# Altium PCB EST_MainV20.PcbDoc (part 5 of 8)
Units mm, origin at the board's own origin, x right, y up, seen from the top; angles counter-clockwise.
Board outline 69.72 x 115.32 mm, 2 copper layers (Top Layer, Bottom Layer); 330 components, 239 nets, 1066 pads, 416 vias.
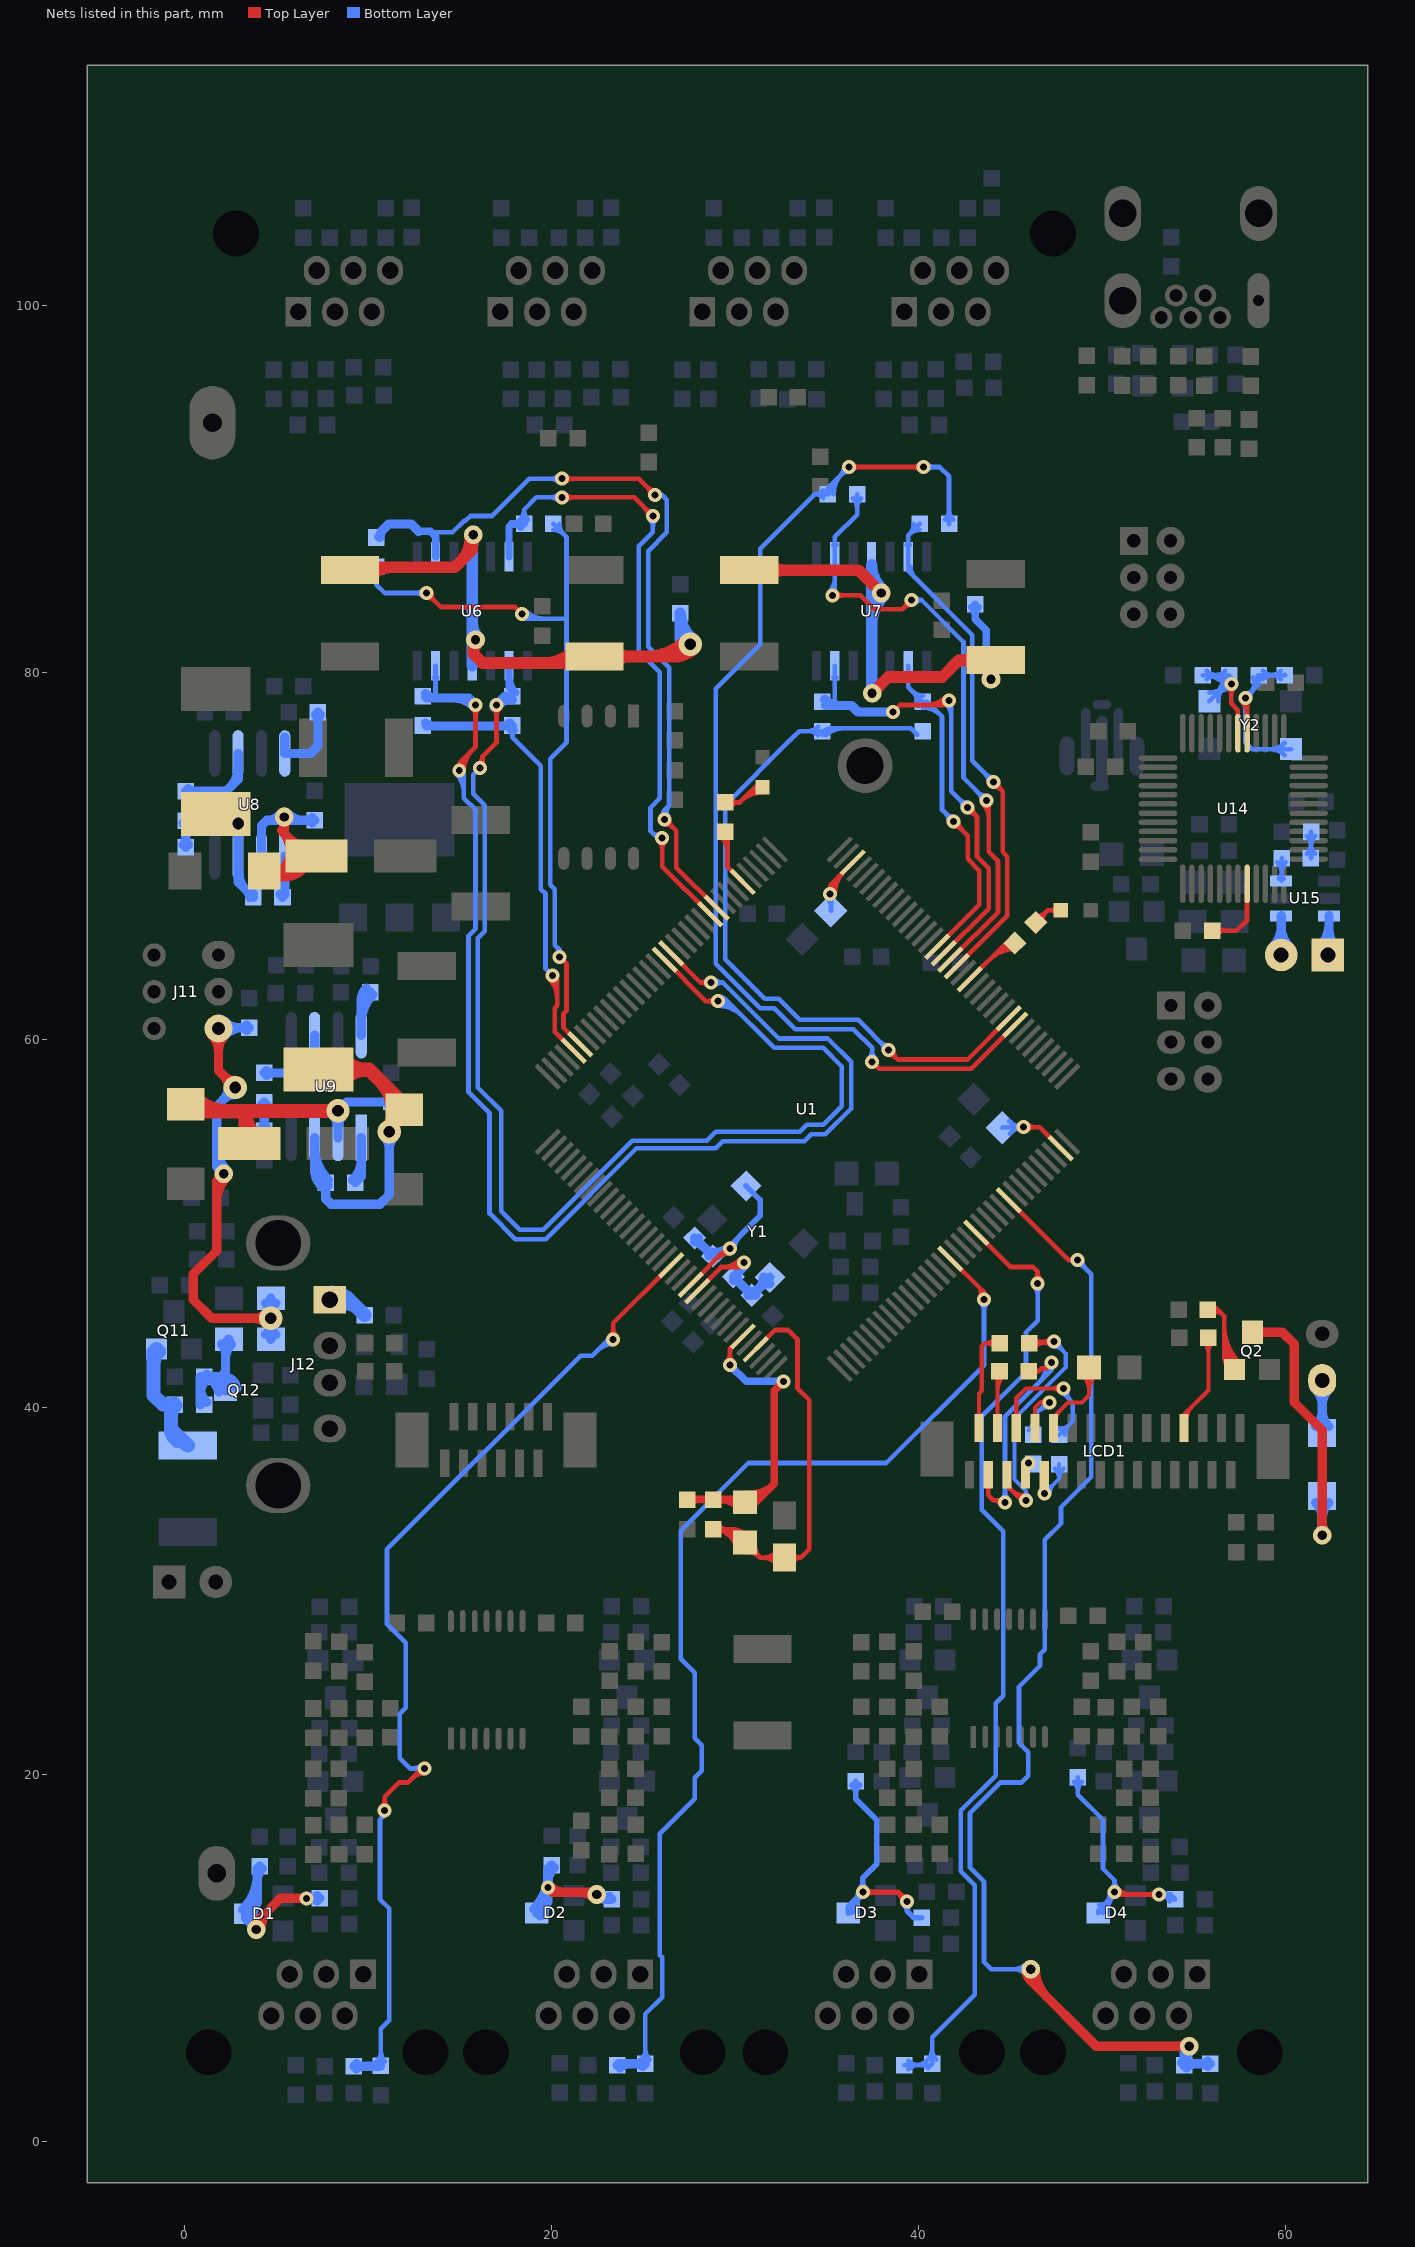
[diagram p5: the nets of this part, all layers, seen from the top]

## Via types
v1: diameter 0.762, hole 0.381, Top Layer to Bottom Layer, 258 vias
v2: diameter 1.27, hole 0.635, Top Layer to Bottom Layer, 91 vias
v3: diameter 1.016, hole 0.508, Top Layer to Bottom Layer, 66 vias
v4: diameter 1.524, hole 0.635, Top Layer to Bottom Layer, 1 vias

## Nets (pads, with @x,y where several pads share a name; then routed paths per layer and width w, separated by ;. In a path a pad name is that pad's centre, name@x,y a point inside that pad or via, vN(x,y) a via of type N, cw(c..) or ccw(c..) an arc to the next point about the centre after c; other vN are vias at no path point) (continued)
LED1: R169.2 U1.88 | length 6.4
  Top Layer w0.254: U1.88@42.786,63.29 44.758,65.262 R169.2@45.247,65.262 ; 43.861,64.366 cw(c45.247,62.98) R169.2@45.247,64.939 ; 44.295,64.799 cw(c45.247,63.847) R169.2@45.247,65.193 ; R169.2@44.729,65.233 cw(c45.247,64.715) R169.2@45.247,65.447
LED2: R170.2 U1.114 | length 4.8
  Top Layer w0.254: R170.2@29.235,71.095 cw(c28.376,70.236) 29.591,70.236 ; R170.2@29.415,71.275 cw(c28.989,70.849) 29.591,70.849 ; R170.2@29.464,71.323 29.591,71.196 29.591,69.415 U1.114@30.412,68.594 ; 29.591,70.851 cw(c29.936,70.851) R170.2@29.692,71.095
LEGDETA: C19.1 R50.2 U1.20 | length 63.2
  Top Layer w0.254: v1@10.742,18.214 ccw(c10.309,18.647) 10.922,18.647 ccw(c11.535,18.647) v1@11.102,18.214 ; v1(10.922,18.034) 10.922,18.796 11.684,19.558 12.192,19.558 v1@13.208,20.574 ; 12.431,19.797 cw(c13.081,19.146) v1@13.081,20.066 ; 12.737,20.103 ccw(c12.52,20.32) v1@12.827,20.32 ; v1@23.188,43.868 ccw(c22.755,44.301) 23.368,44.301 ccw(c23.981,44.301) v1@23.548,43.868 ; v1(23.368,43.688) 23.368,44.579 U1.20@26.523,47.734
  Bottom Layer w0.254: C19.1@10.492,4.364 ccw(c9.94,4.916) 10.72,4.916 ccw(c11.5,4.916) C19.1@10.948,4.364 ; C19.1@10.72,4.136 10.72,6.148 11.176,6.604 11.176,12.7 10.668,13.208 10.668,17.526 10.922,17.78 v1(10.922,18.034) ; v1@12.901,20.14 ccw(c12.468,19.707) 12.468,20.32 ccw(c12.468,20.933) v1@12.901,20.5 ; v1(13.081,20.32) 12.319,20.32 11.747,20.892 11.747,23.304 12.065,23.622 12.065,27.178 11.049,28.194 11.049,32.258 21.59,42.799 22.225,42.799 23.114,43.688 v1(23.368,43.688) ccw(c23.368,43.075) 22.934,43.508 ; 22.501,43.075 cw(c23.368,42.208) v1@23.368,43.434
  Bottom Layer w0.508: R50.2@9.251,4.108 C19.1@10.692,4.108 ; R50.2@9.389,3.97 cw(c9.724,3.635) 9.724,4.108 cw(c9.724,4.581) R50.2@9.389,4.247 ; 10.179,4.108 ccw(c10.179,4.677) C19.1@10.581,4.275
LEGDETB: C20.1 R52.2 U1.54 | length 64.2
  Top Layer w0.254: U1.54@41.725,48.088 43.383,46.431 ; 43.454,46.359 cw(c43.117,46.021) v1(43.561,45.847) 43.383,46.025 43.383,46.431 ; 43.561,46.228 43.561,46.252 43.383,46.431 ; v1@43.635,46.09 cw(c43.739,46.431) 43.383,46.431
  Bottom Layer w0.254: C20.1@24.888,4.473 ccw(c24.337,5.025) 25.117,5.025 ccw(c25.896,5.025) C20.1@25.345,4.473 ; C20.1@25.117,4.245 25.117,6.956 26.035,7.874 26.035,10.033 25.908,10.16 25.908,16.764 27.813,18.669 27.813,19.812 28.194,20.193 28.194,21.59 27.813,21.971 27.813,25.527 27.051,26.289 27.051,33.274 30.734,36.957 38.227,36.957 43.561,42.291 v1(43.561,45.847) v1@43.561,45.974 ; v1@43.381,45.667 cw(c42.948,45.234) 43.561,45.234 cw(c44.174,45.234) v1@43.741,45.667
  Bottom Layer w0.508: R52.2@23.596,4.166 23.675,4.245 C20.1@25.117,4.245 ; R52.2@23.735,4.027 cw(c24.26,3.503) 24.26,4.245 ; C20.1@24.978,4.106 ccw(c24.643,3.772) 24.643,4.245 ccw(c24.643,4.718) C20.1@24.978,4.383
LEGDETC: C21.1 R54.2 U1.58 | length 58.6
  Top Layer w0.254: U1.58@43.14,49.502 45.017,47.625 46.228,47.625 46.482,47.371 v1(46.482,46.736) ; v1@46.302,46.916 ccw(c45.869,47.349) 46.482,47.349 ccw(c47.095,47.349) v1@46.662,46.916
  Bottom Layer w0.254: R54.2@39.217,4.166 40.659,4.166 C21.1@40.738,4.245 40.738,5.686 43.053,8.001 43.053,13.97 42.291,14.732 42.291,18.034 44.196,19.939 44.196,23.876 44.602,24.282 44.602,33.249 43.434,34.417 43.434,39.497 45.847,41.91 45.847,44.069 46.482,44.704 46.482,46.482 v1@46.228,46.736 ; R54.2@39.446,3.938 cw(c39.997,3.386) 39.997,4.166 cw(c39.997,4.946) R54.2@39.446,4.394 ; 39.768,4.166 ccw(c39.768,5.215) 40.509,4.473 ccw(c39.958,5.025) 40.738,5.025 ccw(c41.517,5.025) C21.1@40.966,4.473 ; 40.148,4.166 cw(c40.148,3.655) C21.1@40.509,4.016 ; v1@46.302,46.556 cw(c45.869,46.123) 46.482,46.123 cw(c47.095,46.123) v1@46.662,46.556
LEGDETD: C22.1 R56.2 U1.63 | length 74.6
  Top Layer w0.254: U1.63@44.907,51.27 48.171,48.006 v1(48.641,48.006)
  Top Layer w0.508: v3@45.847,9.398 ccw(c46.767,9.398) 46.116,8.748 ; v3(46.101,9.398) 46.101,8.763 49.657,5.207 v3(54.737,5.207) ; v3@46.355,9.398 ccw(c48.501,9.398) 46.984,7.88 ; v3@54.557,5.027 ccw(c54.124,4.594) 54.124,5.207 ccw(c54.124,5.82) v3@54.557,5.387 ; 46.101,8.785 cw(c46.714,8.785) 46.281,9.218 ccw(c46.714,8.785) 46.101,8.785 ; 46.101,8.785 ccw(c45.488,8.785) 45.921,9.218 cw(c45.488,8.785) 46.101,8.785
  Bottom Layer w0.254: v3@45.832,9.129 ccw(c45.181,8.478) 45.181,9.398 ccw(c45.181,10.318) v3@45.832,9.667 ; v3(46.101,9.398) 43.942,9.398 43.561,9.779 43.561,14.15 42.799,14.912 42.799,17.907 44.45,19.558 45.593,19.558 45.974,19.939 45.974,21.209 45.466,21.717 45.466,24.765 46.609,25.908 46.609,26.543 46.863,26.797 46.863,32.766 47.752,33.655 47.752,34.544 49.403,36.195 49.403,47.244 v1(48.641,48.006) ; v1@48.641,47.752 cw(c48.641,47.139) 49.075,47.572 cw(c49.508,48.006) v1@48.895,48.006
  Bottom Layer w0.508: R56.2@54.319,4.305 ccw(c53.984,4.639) 54.457,4.639 ccw(c54.931,4.639) R56.2@54.596,4.305 ; R56.2@54.457,4.129 cw(c55.559,4.129) v3@54.891,5.005 ; R56.2@54.596,4.027 cw(c55.121,3.503) 55.121,4.245 ; v3(54.737,5.207) 54.457,4.927 R56.2@54.457,4.166 54.536,4.245 C22.1@55.876,4.245 ; C22.1@55.737,4.106 ccw(c55.403,3.772) 55.403,4.245 ccw(c55.403,4.718) C22.1@55.737,4.383
MAIN0: R106.1 U1.125 U6.6 | length 80.8
  Top Layer w0.254: v1@15.24,74.676 cw(c16.773,74.676) 15.689,75.76 ; 15.255,75.326 ccw(c15.906,74.676) v1(14.986,74.676) 14.986,75.057 15.875,75.946 v1(15.875,78.232) ; v1@15.695,78.052 cw(c15.262,77.619) 15.875,77.619 cw(c16.488,77.619) v1@16.055,78.052 ; U1.125@26.523,64.705 28.108,63.119 ; v1@28.518,62.944 ccw(c28.108,62.552) 28.108,63.119 ; v1@28.518,63.294 cw(c28.108,63.686) 28.108,63.119 ; v1(28.702,63.119) 28.108,63.119
  Bottom Layer w0.254: U6.6@13.607,79.729 cw(c13.397,79.519) 13.694,79.519 cw(c13.991,79.519) U6.6@13.781,79.729 ; U6.6@13.694,80.366 13.694,78.635 13.716,78.613 ; v1@14.806,74.496 cw(c13.76,73.45) 15.24,73.45 ; v1@14.986,74.803 v1(14.986,74.676) ; 15.24,74.063 ccw(c14.373,74.063) v1(14.986,74.676) ; v1(28.702,63.119) 29.337,63.119 32.385,60.071 35.052,60.071 36.322,58.801 36.322,56.261 34.925,54.864 34.163,54.864 33.782,54.483 29.337,54.483 28.956,54.102 24.638,54.102 19.685,49.149 18.034,49.149 16.637,50.546 16.637,56.007 15.494,57.15 15.494,65.659 15.875,66.04 15.875,72.517 15.24,73.152 15.24,74.422 v1(14.986,74.676) ; v1@28.882,62.939 cw(c29.315,62.506) 29.315,63.119 cw(c29.315,63.732) v1@28.882,63.299
  Bottom Layer w0.508: R106.1@13.145,78.852 ccw(c13.716,79.415) 13.716,78.613 ; R106.1@13.157,78.664 13.208,78.613 13.716,78.613 ; 14.649,78.613 cw(c14.649,77.006) v1@15.785,78.142 ; v1@15.85,78.207 v1(15.875,78.232) 15.494,78.613 13.716,78.613
MAIN1: R105.1 U1.126 U6.2 | length 76.7
  Top Layer w0.254: v1@16.009,75.027 ccw(c15.79,75.438) 16.256,75.438 ; v1@16.256,74.803 16.256,75.438 ; v1@16.838,78.052 cw(c16.405,77.619) 17.018,77.619 cw(c17.631,77.619) v1@17.198,78.052 ; v1(17.018,78.232) 17.018,76.2 16.256,75.438 ; U1.126@26.169,64.351 28.417,62.103 v1(29.083,62.103) ; v1@28.903,61.923 ccw(c28.47,61.49) 28.47,62.103 ccw(c28.47,62.716) v1@28.903,62.283
  Bottom Layer w0.254: v1(16.129,74.803) 15.748,74.422 15.748,73.406 16.383,72.771 16.383,65.913 16.002,65.532 16.002,57.404 17.272,56.134 17.272,50.673 18.288,49.657 19.558,49.657 24.409,54.508 28.473,54.508 28.956,54.991 33.528,54.991 33.909,55.372 34.798,55.372 35.814,56.388 35.814,58.547 34.798,59.563 32.131,59.563 29.591,62.103 ; v1@29.083,61.849 cw(c29.083,60.009) 30.384,61.31 ; v1@29.083,62.357 cw(c29.083,61.744) 29.517,62.177 ; v1@29.232,61.897 cw(c29.51,61.514) 29.845,61.849 ; v1@29.286,61.951 cw(c29.591,61.722) 29.591,62.103 ; v1@29.286,62.255 ccw(c29.591,62.484) 29.591,62.103 ; 29.635,62.059 ccw(c29.333,61.758) v1(29.083,62.103) ; 29.95,61.744 ccw(c29.083,60.877) v1(29.083,62.103) ; v1(29.083,62.103) 29.591,62.103
  Bottom Layer w0.406: U6.2@17.694,79.763 ccw(c18.931,79.763) R105.1@18.057,78.889 ; U6.2@17.694,80.366 17.694,79.207 17.882,79.019 R105.1@17.882,78.715
  Bottom Layer w0.508: v1@16.896,78.11 cw(c17.882,77.125) R105.1@17.882,78.519 ; v1(17.018,78.232) R105.1@17.501,78.715
MAPWM: R105.2 R106.2 U1.140 | length 27.5
  Top Layer w0.254: v1@19.886,63.32 cw(c18.84,62.274) 20.32,62.274 ; 20.32,62.887 ccw(c19.453,62.887) v1(20.066,63.5) 20.32,63.246 20.32,61.849 20.193,61.722 20.193,60.428 U1.140@21.219,59.401
  Bottom Layer w0.254: R105.2@17.692,76.854 cw(c17.418,76.479) 17.882,76.479 ; R105.2@17.882,77.115 17.882,77.089 17.882,76.479 ; R105.2@18.072,76.854 ccw(c18.346,76.479) 17.882,76.479 ; v1(20.066,63.5) 19.685,63.881 19.685,67.945 19.431,68.199 19.431,74.93 18.288,76.073 17.882,76.479
  Bottom Layer w0.508: R106.2@13.144,77.253 ccw(c13.54,77.65) 13.54,77.089 ; R106.2@13.208,77.089 R105.2@17.882,77.089 ; 17.347,77.089 ccw(c17.347,77.65) R105.2@17.743,77.253
MBIN0: R108.1 U1.118 U6.9 | length 50.7
  Top Layer w0.254: v1(20.574,90.551) 24.765,90.551 v1(25.654,89.662) ; v1@20.754,90.371 cw(c21.187,89.938) 21.187,90.551 cw(c21.187,91.164) v1@20.754,90.731 ; v1@25.4,89.662 ccw(c24.787,89.662) 25.22,90.096 ccw(c25.654,90.529) v1@25.654,89.916 ; v1@26.162,71.755 cw(c26.162,71.142) 26.596,71.575 cw(c27.029,72.009) v1@26.416,72.009 ; v1(26.162,72.009) 26.797,71.374 26.797,69.38 U1.118@28.998,67.18
  Bottom Layer w0.254: R108.1@10.465,87.351 10.465,87.401 R108.1@10.744,87.68 ; 13.487,87.63 14.618,87.63 15.253,88.265 ; 15.289,88.228 15.58,88.519 16.764,88.519 18.796,90.551 v1(20.574,90.551) ; v1@20.394,90.371 ccw(c19.961,89.938) 19.961,90.551 ccw(c19.961,91.164) v1@20.394,90.731 ; v1@26.01,72.212 ccw(c25.781,72.517) 26.162,72.517 ; 26.171,89.526 ccw(c25.796,89.15) v1(25.654,89.662) 26.035,89.662 26.289,89.408 26.289,87.63 25.273,86.614 25.273,81.407 26.416,80.264 26.416,72.771 ; 26.206,72.561 ccw(c26.507,72.259) v1(26.162,72.009) 26.162,72.517 ; v1@26.314,72.212 cw(c26.543,72.517) 26.162,72.517 ; v1@26.368,72.158 cw(c26.751,72.436) 26.416,72.771 ; 26.162,72.517 26.416,72.771
  Bottom Layer w0.406: 12.763,87.694 13.399,87.694 13.694,87.398 U6.9@13.694,86.306
  Bottom Layer w0.508: R108.1@10.661,87.351 cw(c11.257,87.351) R108.1@10.836,87.772 ; R108.1@10.744,87.68 11.151,88.087 12.37,88.087 12.763,87.694
MBIN1: R107.1 U1.119 U6.13 | length 42.8
  Top Layer w0.254: v1(20.574,89.535) 24.511,89.535 v1(25.527,88.519) ; v1@20.754,89.355 cw(c21.187,88.922) 21.187,89.535 cw(c21.187,90.148) v1@20.754,89.715 ; v1@25.273,88.519 ccw(c24.66,88.519) 25.093,88.953 ccw(c25.527,89.386) v1@25.527,88.773 ; v1@25.855,70.813 cw(c25.422,70.38) 26.035,70.38 cw(c26.648,70.38) v1@26.215,70.813 ; v1(26.035,70.993) 26.035,69.435 U1.119@28.644,66.826
  Bottom Layer w0.254: R107.1@18.288,88.316 ccw(c17.737,88.867) 18.517,88.867 ccw(c19.296,88.867) R107.1@18.745,88.316 ; R107.1@18.517,88.367 R107.1@18.517,88.088 18.517,88.875 19.177,89.535 v1(20.574,89.535) ; v1@20.394,89.355 ccw(c19.961,88.922) 19.961,89.535 ccw(c19.961,90.148) v1@20.394,89.715 ; v1@25.347,88.339 cw(c24.914,87.906) 25.527,87.906 cw(c26.14,87.906) v1@25.707,88.339 ; 25.527,71.247 ccw(c25.737,71.457) v1@25.898,71.207 ; v1(25.527,88.519) 25.527,87.63 24.765,86.868 24.765,81.153 25.908,80.01 25.908,73.152 25.4,72.644 25.4,71.374 25.781,70.993 v1(26.035,70.993)
  Bottom Layer w0.406: U6.13@17.694,86.306 17.694,87.925 17.857,88.088 R107.1@18.517,88.088 ; R107.1@18.342,87.913 ccw(c17.921,87.492) 17.921,88.088 ccw(c17.921,88.683) R107.1@18.342,88.262
MBPWM: R107.2 R108.2 U1.139 | length 48.2
  Top Layer w0.254: v1@13.208,84.074 cw(c13.208,83.461) 13.642,83.894 cw(c14.075,84.328) v1@13.462,84.328 ; v1(13.208,84.328) 13.97,83.566 18.034,83.566 v1(18.415,83.185) ; v1(20.447,64.516) 20.828,64.135 20.828,61.595 20.661,61.428 20.661,60.666 U1.139@21.573,59.755
  Bottom Layer w0.254: R108.2@10.237,85.522 cw(c9.685,84.971) 10.465,84.971 cw(c11.245,84.971) R108.2@10.694,85.522 ; R108.2@10.465,85.751 10.465,84.785 10.922,84.328 v1(13.208,84.328) ; v1@13.028,84.148 ccw(c12.595,83.715) 12.595,84.328 ccw(c12.595,84.941) v1@13.028,84.508 ; v1@18.415,82.931 20.828,82.931 ; v1(18.415,83.185) ccw(c19.028,83.798) 19.028,82.931 ; v1@18.595,83.365 ccw(c19.641,84.411) 19.641,82.931 ; R107.2@20.117,87.765 cw(c20.117,86.985) 20.668,87.536 cw(c21.219,88.088) R107.2@20.44,88.088 ; R107.2@20.117,88.088 20.828,87.376 20.828,82.931 ; 20.311,65.033 cw(c19.935,64.658) v1(20.447,64.516) ; 20.447,64.897 20.193,65.151 20.193,68.199 19.939,68.453 19.939,75.311 20.828,76.2 20.828,82.931
MCIN0: R124.1 U1.92 U7.6 | length 32.2
  Top Layer w0.254: v1(38.608,77.851) 38.989,78.232 41.402,78.232 v1(41.656,78.486) cw(c41.043,79.099) 41.043,78.232 ; 40.43,78.232 ccw(c40.43,79.712) v1@41.476,78.666 ; U1.92@41.372,64.705 43.815,67.148 43.815,69.342 43.18,69.977 43.18,72.136 v1(42.672,72.644) ; v1@42.672,72.39 cw(c42.672,71.777) 43.106,72.21 cw(c43.539,72.644) v1@42.926,72.644
  Bottom Layer w0.254: U7.6@35.35,79.729 cw(c35.14,79.519) 35.437,79.519 cw(c35.734,79.519) U7.6@35.524,79.729 ; 35.433,78.207 35.437,78.21 U7.6@35.437,80.366 ; v1@41.476,78.306 cw(c40.736,77.566) 41.783,77.566 ; v1(41.656,78.486) 41.783,78.359 41.783,73.533 v1(42.672,72.644) ; v1@42.418,72.644 ccw(c41.805,72.644) 42.238,73.078 ccw(c42.672,73.511) v1@42.672,72.898
  Bottom Layer w0.508: R124.1@34.886,78.548 ccw(c35.711,79.374) 35.711,78.207 ; R124.1@34.951,78.207 35.433,78.207 ; v1(38.608,77.851) 36.703,77.851 36.347,78.207 35.433,78.207 ; 35.433,78.207 cw(c35.433,78.799) 34.918,78.506 ccw(c35.433,78.799) 35.433,78.207
MCIN1: R123.1 U1.93 U7.2 | length 23.3
  Top Layer w0.254: U1.93@41.018,65.058 43.307,67.347 43.307,69.215 42.672,69.85 42.672,71.12 v1(41.91,71.882) ; v1@41.91,71.628 cw(c41.91,71.015) 42.344,71.448 cw(c42.777,71.882) v1@42.164,71.882
  Bottom Layer w0.254: U7.2@39.35,79.729 cw(c39.14,79.519) 39.437,79.519 cw(c39.734,79.519) U7.2@39.524,79.729 ; U7.2@39.437,80.366 39.437,79.207 R123.1@40.234,78.41 40.462,78.41 41.275,77.597 41.275,73.406 41.275,72.517 v1(41.91,71.882) ; R123.1@39.911,78.41 ccw(c39.131,78.41) 39.683,78.961 ccw(c40.234,79.513) R123.1@40.234,78.733 ; R123.1@39.929,78.207 R123.1@40.03,78.207 ; R123.1@40.234,78.087 cw(c40.234,76.756) 41.175,77.697 ; R123.1@40.234,78.341 cw(c40.234,77.623) 40.741,78.131 ; v1@41.656,71.882 ccw(c41.043,71.882) 41.476,72.316 ccw(c41.91,72.749) v1@41.91,72.136
MCPWM: R123.2 R124.2 U1.82 | length 44.9
  Top Layer w0.254: v1@38.354,59.182 cw(c38.354,58.569) 38.788,59.002 cw(c39.221,59.436) v1@38.608,59.436 ; v1(38.354,59.436) 38.862,58.928 42.666,58.928 U1.82@44.907,61.169
  Bottom Layer w0.254: 33.3,76.607 33.02,76.327 ; R124.2@34.519,76.581 ccw(c33.968,76.03) 33.968,76.81 ccw(c33.968,77.59) R124.2@34.519,77.038 ; R124.2@34.748,76.607 34.951,76.607 35.306,76.962 ; R124.2@34.748,76.81 33.503,76.81 33.02,76.327 ; R124.2@34.796,76.761 cw(c35.282,76.276) 35.282,76.962 ; R124.2@34.976,76.581 cw(c35.895,75.663) 35.895,76.962 ; R124.2@35.066,76.758 cw(c35.306,76.719) 35.306,76.962 ; v1@38.1,59.436 ccw(c37.487,59.436) 37.92,59.87 ccw(c38.354,60.303) v1@38.354,59.69 ; v1(38.354,59.436) 36.703,61.087 33.528,61.087 32.385,62.23 31.623,62.23 29.464,64.389 29.464,72.771 33.02,76.327 ; R123.2@39.929,76.607 39.574,76.962 35.306,76.962
MDIN0: R126.1 U1.91 U7.9 | length 41.1
  Top Layer w0.254: v1(35.306,84.201) 36.83,84.201 37.592,83.439 39.116,83.439 v1(39.624,83.947) ; v1@35.486,84.021 cw(c35.919,83.588) 35.919,84.201 cw(c35.919,84.814) v1@35.486,84.381 ; v1@39.37,83.947 cw(c38.757,83.947) 39.19,83.513 cw(c39.624,83.08) v1@39.624,83.693 ; U1.91@41.725,64.351 44.323,66.949 44.323,69.723 43.815,70.231 v1@43.815,72.898 ; v1@43.508,72.845 cw(c42.768,72.105) 43.815,72.105
  Bottom Layer w0.254: v1@35.126,84.381 ccw(c34.377,85.13) 35.437,85.13 ; v1(35.306,84.201) 35.437,84.332 U7.9@35.437,86.306 35.437,87.38 36.652,88.595 R126.1@36.652,89.712 ; U7.9@35.35,85.669 cw(c35.14,85.459) 35.437,85.459 cw(c35.734,85.459) U7.9@35.524,85.669 ; U7.9@35.35,86.943 ccw(c35.14,87.153) 35.437,87.153 ccw(c35.734,87.153) U7.9@35.524,86.943 ; R126.1@36.424,89.484 cw(c35.872,88.933) 36.652,88.933 cw(c37.432,88.933) R126.1@36.881,89.484 ; v1(39.624,83.947) 40.155,83.947 ; v1@39.822,83.788 cw(c40.155,83.519) 40.155,83.947 ; v1@39.822,84.106 ccw(c40.155,84.375) 40.155,83.947 ; v1@43.434,73.025 ccw(c42.821,73.025) 43.254,73.459 ccw(c43.688,73.892) v1@43.688,73.279 ; v1(43.688,73.025) 42.443,74.27 42.443,81.659 40.155,83.947
MDIN1: R125.1 U1.90 U7.13 | length 32
  Top Layer w0.254: U1.90@42.079,63.998 44.831,66.75 44.831,69.977 44.577,70.231 44.577,73.533 v1(44.069,74.041) ; v1@44.069,73.787 cw(c44.069,73.174) 44.503,73.607 cw(c44.936,74.041) v1@44.323,74.041
  Bottom Layer w0.254: U7.13@39.35,86.943 ccw(c39.14,87.153) 39.437,87.153 ccw(c39.734,87.153) U7.13@39.524,86.943 ; U7.13@39.56,85.756 ccw(c40.398,85.756) 39.805,85.163 ; R125.1@39.733,88.088 cw(c38.953,88.088) 39.504,87.536 cw(c40.056,86.985) R125.1@40.056,87.765 ; R125.1@40.056,88.088 39.437,87.469 U7.13@39.437,86.306 39.437,85.531 42.926,82.042 42.926,75.184 v1(44.069,74.041) ; v1@43.815,74.041 ccw(c43.202,74.041) 43.635,74.475 ccw(c44.069,74.908) v1@44.069,74.295
MDPWM: R125.2 R126.2 U1.81 | length 68.2
  Top Layer w0.254: v1(36.195,91.186) v1(40.259,91.186) ; v1@36.375,91.006 cw(c36.808,90.573) 36.808,91.186 cw(c36.808,91.799) v1@36.375,91.366 ; v1(37.465,58.801) 37.846,58.42 42.865,58.42 U1.81@45.261,60.816 ; v1@40.079,91.006 ccw(c39.646,90.573) 39.646,91.186 ccw(c39.646,91.799) v1@40.079,91.366
  Bottom Layer w0.254: R126.2@34.809,89.5 ccw(c34.34,89.09) 34.34,89.712 ; R126.2@34.809,89.925 cw(c34.34,90.335) 34.34,89.712 ; R126.2@35.121,89.712 cw(c36.086,89.712) 35.404,90.395 ; R126.2@35.375,89.712 cw(c36.954,89.712) 35.838,90.829 ; v1@36.195,90.932 ccw(c36.195,90.319) 35.761,90.752 ccw(c35.328,91.186) 35.941,91.186 v1(36.195,91.186) 35.052,90.043 R126.2@35.052,89.712 34.34,89.712 ; v1@37.285,58.981 ccw(c36.852,59.414) 37.465,59.414 ccw(c38.078,59.414) v1@37.645,58.981 ; v1(37.465,58.801) 37.465,59.563 36.449,60.579 33.274,60.579 32.131,61.722 31.369,61.722 28.956,64.135 28.956,79.121 31.369,81.534 31.369,86.741 34.34,89.712 ; v1(40.259,91.186) 41.148,91.186 41.656,90.678 R125.2@41.656,88.088 ; v1@40.439,91.006 cw(c40.872,90.573) 40.872,91.186 cw(c40.872,91.799) v1@40.439,91.366 ; R125.2@41.427,88.316 ccw(c40.876,88.867) 41.656,88.867 ccw(c42.436,88.867) R125.2@41.884,88.316
NetC1_1: C1.1 LCD1.29 | length 7.5
  Top Layer w0.229: LCD1.29@43.186,39.458 ccw(c42.954,39.69) 43.282,39.69 ccw(c43.609,39.69) LCD1.29@43.378,39.458 ; LCD1.29@43.282,38.862 43.282,40.742 43.434,40.894 43.434,41.275 ; 43.434,41.148 43.434,41.275 ; C1.1@44.183,43.252 ccw(c43.616,42.69) 43.616,43.489 ; C1.1@44.183,43.725 cw(c43.616,44.288) 43.616,43.489 ; C1.1@44.422,43.489 43.616,43.489 ; 43.434,41.275 43.434,43.307 43.616,43.489
NetC1_2: C1.2 LCD1.26 | length 23
  Top Layer w0.229: LCD1.26@44.806,36.322 44.806,35.712 45.593,34.925 v1(45.847,34.925) ; LCD1.26@44.941,35.822 ccw(c45.534,35.822) 45.115,35.403 ; 44.958,35.56 ccw(c45.847,36.449) v1@45.847,35.192 ; 45.348,35.17 ccw(c45.847,35.668) v1@45.847,34.963 ; 46.553,43.489 ccw(c46.553,44.379) 47.182,43.75 cw(c46.727,44.205) 46.727,43.561 cw(c46.727,42.917) 47.182,43.372 ccw(c46.901,43.091) 46.901,43.489 ; 46.658,43.561 cw(c46.658,44.125) 46.259,43.726 ccw(c46.832,44.299) 46.832,43.489 ccw(c46.832,42.678) 46.259,43.251 cw(c47.006,42.504) v1@47.006,43.561 ; v1@47.045,43.489 C1.2@46.022,43.489 46.094,43.561 v1(47.371,43.561)
  Bottom Layer w0.229: v1@45.696,35.145 ccw(c45.497,35.433) 45.847,35.433 ; v1(45.847,34.925) 45.847,35.433 ; v1@45.998,35.145 cw(c46.197,35.433) 45.847,35.433 ; v1@47.371,43.294 cw(c47.371,42.65) 47.826,43.106 cw(c48.282,43.561) v1@47.638,43.561 ; v1(47.371,43.561) 48.006,42.926 48.006,42.164 45.212,39.37 45.212,36.068 45.847,35.433
NetC2_1: C2.1 LCD1.28 | length 16.6
  Top Layer w0.254: LCD1.28@43.703,35.735 cw(c43.493,35.525) 43.79,35.525 cw(c44.087,35.525) LCD1.28@43.877,35.735 ; LCD1.28@43.79,36.322 43.79,35.204 44.069,34.925 ; v1@44.48,34.678 ccw(c44.069,34.459) 44.069,34.925 ; v1@44.704,34.925 44.069,34.925 ; C2.1@46.002,41.957 46.529,41.957 ; C2.1@46.29,41.811 cw(c46.529,41.689) 46.529,41.957 ; C2.1@46.29,42.103 ccw(c46.529,42.224) 46.529,41.957 ; v1(47.244,42.418) 46.927,42.101 46.673,42.101 46.529,41.957
  Bottom Layer w0.254: v1@44.524,34.978 ccw(c44.091,35.411) 44.704,35.411 ccw(c45.317,35.411) v1@44.884,34.978 ; v1@44.704,34.925 44.704,39.497 47.244,42.037 v1(47.244,42.418) cw(c46.324,42.418) 46.975,41.768 ; 46.541,41.334 ccw(c45.457,42.418) v1@46.99,42.418
  other v1: 44.704,34.798
NetC2_2: C2.2 LCD1.27 | length 5.4
  Top Layer w0.229: C2.2@44.165,41.719 cw(c43.845,41.399) 44.298,41.399 ; LCD1.27@44.202,39.458 ccw(c43.97,39.69) 44.298,39.69 ccw(c44.625,39.69) LCD1.27@44.394,39.458 ; LCD1.27@44.298,38.862 44.298,41.852 C2.2@44.402,41.957 ; 44.298,40.893 cw(c45.466,40.893) C2.2@44.64,41.719 ; 44.298,41.445 cw(c44.914,41.445) C2.2@44.478,41.881
NetC3_1: C3.1 LCD1.25 | length 11.2
  Top Layer w0.229: LCD1.25@45.218,39.458 ccw(c44.986,39.69) 45.314,39.69 ccw(c45.641,39.69) LCD1.25@45.41,39.458 ; LCD1.25@45.314,38.862 45.314,40.488 45.847,41.021 v1(47.879,41.021) ; v1@47.69,40.832 ccw(c47.235,40.377) 47.235,41.021 ccw(c47.235,41.665) v1@47.69,41.21
  Bottom Layer w0.229: C3.1@47.646,38.484 48.387,39.225 48.387,40.259 v1@47.752,40.894 ; C3.1@47.646,38.82 ccw(c47.646,39.63) 48.219,39.057 ccw(c48.793,38.484) C3.1@47.982,38.484 ; v1@47.915,41.009 ccw(c48.249,40.896) 48,40.646 ; v1@48.132,40.935 ccw(c48.638,40.764) 48.26,40.386
NetC3_2: C3.2 LCD1.22 | length 4.1
  Bottom Layer w0.229: v1(46.863,35.306) 47.646,36.089 ; v1@46.863,35.573 ccw(c46.863,36.217) 47.318,35.761 ccw(c47.774,35.306) v1@47.13,35.306 ; C3.2@47.412,36.643 cw(c46.874,36.089) 47.646,36.089 ; C3.2@47.646,36.884 47.646,36.089 ; C3.2@47.88,36.643 ccw(c48.419,36.089) 47.646,36.089
NetC4_1: C4.1 LCD1.24
  other v1: 45.974,36.957
NetC4_2: C4.2 LCD1.23 | length 7.7
  Top Layer w0.229: LCD1.23@46.234,39.458 ccw(c46.002,39.69) 46.33,39.69 ccw(c46.657,39.69) LCD1.23@46.426,39.458 ; LCD1.23@46.33,38.862 46.33,39.98 46.609,40.259 ; v1@46.897,40.108 ccw(c46.609,39.909) 46.609,40.259 ; v1@46.897,40.41 cw(c46.609,40.609) 46.609,40.259 ; v1(47.117,40.259) 46.609,40.259
  Bottom Layer w0.229: C4.2@45.995,38.741 ccw(c45.422,39.314) 46.232,39.314 ccw(c47.042,39.314) C4.2@46.469,38.741 ; C4.2@46.232,38.503 46.232,39.501 46.99,40.259 v1(47.117,40.259) ; 46.445,39.714 cw(c47.117,39.042) v1@47.117,39.992 ; 46.752,40.021 ccw(c46.513,40.259) v1@46.85,40.259
NetC5_2: C5.2 LCD1.21 | length 8.2
  Top Layer w0.229: LCD1.21@47.346,38.862 47.346,39.472 48.133,40.259 48.895,40.259 49.284,40.648 C5.2@49.284,42.166 ; LCD1.21@47.481,39.362 cw(c48.074,39.362) 47.655,39.781 ; C5.2@48.906,41.787 cw(c47.991,40.872) 49.284,40.872 cw(c50.578,40.872) C5.2@49.663,41.787 ; C5.2@49.067,41.948 cw(c48.543,41.424) 49.284,41.424 cw(c50.026,41.424) C5.2@49.502,41.948
NetC6_2: C6.2 R4.2 U1.23 Y1.1 | length 15.4
  Top Layer w0.254: U1.23@27.583,46.674 29.551,48.641 v1(29.718,48.641) ; 28.999,48.089 cw(c29.718,47.37) v1@29.718,48.387
  Bottom Layer w0.305: R4.2@28.788,48.218 ccw(c28.788,49.135) v1@29.436,48.486 ; R4.2@28.788,48.225 29.175,48.225 31.369,50.419 31.369,51.283 Y1.1@30.602,52.05 ; R4.2@28.788,48.522 ccw(c28.788,50.176) 29.957,49.007 ; R4.2@29.111,48.161 cw(c29.718,47.555) v1@29.718,48.412 ; v1@29.947,48.641 cw(c30.805,48.641) 30.198,49.248
  Bottom Layer w0.508: C6.2@27.798,49.013 cw(c27.798,48.54) 28.133,48.874 cw(c28.468,49.209) C6.2@27.994,49.209 ; C6.2@27.798,49.209 R4.2@28.782,48.225 ; 28.444,48.563 ccw(c28.788,48.906) R4.2@28.788,48.421 ; 28.457,48.551 cw(c28.131,48.225) R4.2@28.592,48.225
NetC7_2: C7.2 R4.1 U1.24 Y1.2 | length 13.1
  Top Layer w0.254: U1.24@27.937,46.32 29.242,47.625 30.226,47.625 v1(30.48,47.879) cw(c29.867,48.492) 29.867,47.625 ; 29.254,47.625 ccw(c29.254,49.105) v1@30.3,48.059
  Bottom Layer w0.508: R4.1@29.919,46.897 cw(c29.919,46.424) 30.253,46.759 cw(c30.588,47.093) R4.1@30.115,47.093 ; R4.1@30.104,47.279 ccw(c29.504,47.879) v1@30.353,47.879 ; v1(30.48,47.879) 30.48,47.654 R4.1@29.919,47.093 30.92,46.092 C7.2@30.926,46.092 Y1.2@31.9,47.068 Y1.2@31.9,47.068 ; 30.581,46.431 ccw(c30.926,46.776) 30.926,46.288 ccw(c30.926,46.761) 31.261,46.427 ccw(c31.596,46.092) C7.2@31.122,46.092 ; 30.596,46.416 cw(c30.272,46.092) C7.2@30.73,46.092 ; 31.308,46.474 ccw(c30.715,47.068) Y1.2@31.554,47.068 ; 31.312,46.478 cw(c31.9,45.891) Y1.2@31.9,46.722
NetC9_1: C9.1 U1.71 | length 7.3
  Top Layer w0.254: v1(45.72,55.245) 46.589,55.245 U1.71@47.736,54.098 ; v1@45.9,55.065 cw(c46.333,54.632) 46.333,55.245 cw(c46.333,55.858) v1@45.9,55.425
  Bottom Layer w0.254: C9.1@44.56,55.209 44.596,55.245 v1(45.72,55.245) ; C9.1@44.933,55.575 ccw(c45.72,56.347) v1(45.72,55.245) ; C9.1@44.969,54.883 cw(c45.72,54.284) v1(45.72,55.245) ; v1@45.54,55.065 ccw(c45.107,54.632) 45.107,55.245 ccw(c45.107,55.858) v1@45.54,55.425
NetC10_2: C10.2 U1.106 | length 6.4
  Top Layer w0.254: v1@35.433,67.945 cw(c37.172,67.945) U1.106@35.942,69.175 ; 35.509,68.741 ccw(c36.305,67.945) v1(35.179,67.945) 35.179,68.411 U1.106@36.422,69.654
  Bottom Layer w0.254: v1@34.999,67.765 cw(c34.453,67.219) C10.2@35.226,67.219 ; v1(35.179,67.945) 35.226,67.898 C10.2@35.226,67.029 ; C10.2@35.226,67.444 cw(c35.68,67.444) C10.2@35.359,67.765
NetC13_1: C13.1 C14.2 R10.2 U1.31 | length 27.4
  Top Layer w0.254: v1@29.538,42.471 ccw(c29.105,42.904) 29.718,42.904 ccw(c30.331,42.904) v1@29.898,42.471 ; v1(29.718,42.291) 29.718,43.151 U1.31@30.412,43.845 ; 29.718,42.943 cw(c30.221,42.943) 29.865,43.298 ccw(c29.939,43.09) 29.718,43.09
  Top Layer w0.406: R10.2@27.407,34.976 C14.2@28.822,34.976 ; R10.2@27.582,34.776 cw(c28.064,34.293) 28.064,34.976 ; R10.2@27.582,35.125 ccw(c27.942,35.485) 27.942,34.976 ; 28.161,34.976 cw(c28.161,34.283) C14.2@28.65,34.773 ; 28.298,34.976 ccw(c28.298,35.475) C14.2@28.65,35.122 ; C14.2@28.825,34.976 C13.1@30.886,34.976 ; C14.2@29,34.773 cw(c29.489,34.283) 29.489,34.976 ; C14.2@29,35.122 ccw(c29.352,35.475) 29.352,34.976 ; C14.2@29.105,34.976 cw(c29.105,33.373) C13.1@30.239,34.506 ; 29.847,34.976 ccw(c29.847,35.53) C13.1@30.239,35.138 ; C13.1@30.555,34.822 31.139,34.822 32.131,35.814 ; C13.1@30.559,34.862 ccw(c30.677,36.054) 31.524,35.207 ; C13.1@30.599,35.267 ccw(c30.787,37.158) 32.131,35.814 ; v1@32.461,41.402 cw(c32.032,41.402) 32.335,41.098 cw(c32.639,40.795) v1@32.639,41.224 ; v1(32.639,41.402) 32.131,40.894 32.131,35.814
  Bottom Layer w0.406: v1@29.718,42.113 cw(c29.718,41.684) 30.022,41.987 cw(c30.325,42.291) v1@29.896,42.291 ; v1@29.718,42.164 v1(29.718,42.291) 30.607,41.402 v1(32.639,41.402) ; v1@32.513,41.276 ccw(c32.21,40.973) 32.21,41.402 ccw(c32.21,41.831) v1@32.513,41.528
NetC13_2: C13.2 C14.1 L1.1 U1.33 | length 34.9
  Top Layer w0.254: C14.1@29.053,33.119 cw(c29.605,32.567) 29.605,33.347 cw(c29.605,34.127) C14.1@29.053,33.576 ; C14.1@29.177,33.347 cw(c29.177,32.165) C13.2@30.299,32.537 ; 29.529,33.347 cw(c29.529,32.282) C13.2@30.54,32.617 ; 29.881,33.347 cw(c29.881,32.398) C13.2@30.781,32.697 ; C13.2@30.038,32.704 ccw(c29.303,32.821) 29.829,33.347 ; C13.2@30.058,32.457 ccw(c28.825,32.048) C14.1@28.825,33.347 29.829,33.347 ; C13.2@30.472,33.139 cw(c30.356,33.873) 29.829,33.347 ; C13.2@30.586,32.1 cw(c30.649,31.074) 31.376,31.801 ; C13.2@31.077,32.59 ccw(c32.103,32.528) 31.376,31.801 ; U1.33@31.119,43.138 32.177,44.196 32.893,44.196 33.401,43.688 33.401,41.021 34.036,40.386 34.036,34.671 ; L1.1@32.332,31.442 ccw(c31.465,30.574) 31.465,31.801 ccw(c31.465,33.027) L1.1@32.332,32.16 ; L1.1@33.13,31.544 cw(c33.579,31.28) 33.579,31.801 ; L1.1@33.13,32.058 ccw(c33.579,32.322) 33.579,31.801 ; 34.036,35.56 34.036,34.671 ; 29.829,33.347 C13.2@30.555,32.622 31.376,31.801 ; 31.376,31.801 L1.1@32.691,31.801 33.579,31.801 ; 33.579,31.801 34.036,32.258 34.036,34.671
  Top Layer w0.762: L1.1@32.48,32.012 L1.1@32.691,31.801
NetC40_2: C40.2 E1.1 F2.2 U6.4 U6.11 | length 46
  Top Layer w0.635: F2.2@9.042,85.573 9.195,85.725 14.732,85.725 15.697,86.69 v3@15.697,87.198 ; F2.2@10.182,85.258 cw(c11.309,84.132) 11.309,85.725 ; 15.113,86.106 ccw(c13.989,87.23) v3@15.56,87.474 ; 15.697,86.92 cw(c16.331,86.92) v3@15.883,87.368 ; 15.748,81.021 cw(c16.642,81.021) v3@16.01,81.653 ; v3@15.748,81.356 15.748,81.026 16.256,80.518 16.891,80.518 21.082,80.518 21.438,80.874 E1.1@22.352,80.874 ; 19.595,80.518 ccw(c19.595,82.805) E1.1@21.212,81.188 ; E1.1@21.311,80.874 E1.1@22.352,80.874 ; E1.1@23.492,80.559 cw(c24.251,79.8) 24.251,80.874 cw(c24.251,81.947) E1.1@23.492,81.188 ; 25.198,80.874 ccw(c25.198,83.895) v2@27.334,81.759 ; 26.731,80.874 ccw(c26.731,82.362) v2@27.784,81.309 ; v2(27.559,81.534) 26.899,80.874 E1.1@22.352,80.874
  Bottom Layer w0.635: U6.4@15.697,80.366 15.697,85.954 v3@15.697,87.452 ; U6.4@15.697,80.899 cw(c16.764,80.899) v3@16.01,81.653 ; 15.697,82.677 ccw(c16.764,82.677) v3@16.01,81.923 ; U6.11@15.697,86.92 cw(c16.331,86.92) v3@15.883,87.368 ; 27.022,81.966 ccw(c27.873,81.966) v2@27.372,81.277 ; v2(27.559,81.534) 27.022,82.071 C40.2@27.022,83.214 ccw(c28.781,83.214) v2@27.746,81.791
  other v3: 15.875,81.788 15.748,87.503
NetC48_2: C48.2 E2.1 F3.2 U7.4 U7.11 | length 37.7
  Top Layer w0.635: F3.2@30.785,85.573 36.728,85.573 v3(37.973,84.328) ; F3.2@31.925,85.258 cw(c32.683,84.499) 32.683,85.573 cw(c32.683,86.646) F3.2@31.925,85.887 ; v3(37.465,78.867) 38.354,79.756 41.275,79.756 42.189,80.67 E2.1@44.196,80.67 ; E2.1@43.056,80.356 ccw(c42.297,79.597) 42.297,80.67 ccw(c42.297,81.744) E2.1@43.056,80.985
  Bottom Layer w0.406: C48.2@42.9,83.547 cw(c42.479,83.126) 43.074,83.126 cw(c43.67,83.126) C48.2@43.249,83.547 ; C48.2@43.074,83.722 43.074,82.91 43.688,82.296 43.688,79.883 v3(43.942,79.629) ; 43.688,80.978 ccw(c45.291,80.978) v3@44.158,79.845
  Bottom Layer w0.635: 37.44,79.388 ccw(c37.986,79.388) v3@37.6,79.002 ; 37.44,82.58 cw(c39.721,82.58) v3@38.108,84.193 ; 37.44,84.113 cw(c38.188,84.113) v3@37.659,84.642 ; 37.44,84.515 ccw(c38.126,84.515) v3@37.692,83.983 ; v3(37.465,78.867) 37.44,78.892 37.44,80.264 37.44,84.328 ; v3(37.973,84.328) 37.44,84.328 ; v3@38.093,84.476 cw(c39.215,85.852) 37.44,85.852 37.44,84.328
NetC55_1: C55.1 U8.1 | length 3
  Bottom Layer w0.508: C55.1@5.224,67.91 ccw(c4.59,68.544) 5.486,68.544 ; C55.1@5.362,67.771 5.486,67.895 U8.1@5.486,70.002
NetC55_2: C55.2 L2.1 U8.3 | length 8.2
  Top Layer w0.508: L2.1@2.435,72.292 v2(2.946,71.78)
  Bottom Layer w0.508: v2@2.677,71.511 cw(c2.027,70.861) 2.946,70.861 cw(c3.866,70.861) v2@3.216,71.511 ; v2(2.946,71.78) U8.3@2.946,70.002 2.946,68.587 C55.2@3.762,67.771 ; U8.3@2.997,69.037 ccw(c4.206,69.037) C55.2@3.351,68.182 ; C55.2@3.566,67.771 ccw(c3.093,67.771) 3.428,68.106 ccw(c3.762,68.44) C55.2@3.762,67.967
NetC56_1: C56.1 U9.1 | length 3.8
  Bottom Layer w0.508: C56.1@9.186,52.365 ccw(c8.062,53.49) U9.1@9.652,53.49 ; C56.1@9.325,52.226 9.652,52.554 U9.1@9.652,54.661
NetC56_2: C56.2 D6.2 L3.1 U9.3 | length 32.1
  Top Layer w0.508: v2@11.176,54.808 cw(c11.919,54.808) D6.2@11.888,55.55 ; v2(11.176,54.991) 11.176,55.575 11.786,56.185 ccw(c12.521,55.449) v2@11.537,55.114 ; D6.2@11.176,55.338 cw(c11.897,55.338) D6.2@11.867,56.058
  Top Layer w0.762: L3.1@7.315,58.373 10.08,58.373 11.786,56.667 D6.2@11.786,56.185 ; L3.1@8.594,57.794 cw(c9.992,56.396) 9.992,58.373 cw(c9.992,60.35) L3.1@8.594,58.952 ; 10.707,57.746 cw(c9.146,56.185) D6.2@11.354,56.185
  Bottom Layer w0.508: 7.112,52.953 ccw(c8.451,52.953) C56.2@7.504,52.006 ; U9.3@7.112,54.179 ccw(c9.677,54.179) C56.2@7.863,52.365 ; U9.3@7.112,54.661 7.112,52.839 C56.2@7.725,52.226 7.725,51.33 8.001,51.054 10.668,51.054 11.176,51.562 v2(11.176,54.991) ; C56.2@7.529,52.226 ccw(c7.056,52.226) 7.39,52.561 ccw(c7.725,52.896) C56.2@7.725,52.422 ; C56.2@7.586,52.088 cw(c7.252,51.753) 7.725,51.753 cw(c8.198,51.753) C56.2@7.863,52.088 ; v2@10.907,54.722 cw(c10.256,54.071) 11.176,54.071 cw(c12.096,54.071) v2@11.445,54.722
NetC57_1: C57.1 U8.8 | length 5.4
  Bottom Layer w0.508: U8.8@5.486,76.479 U8.8@5.486,75.59 6.883,75.59 7.293,76 C57.1@7.293,77.83 ; C57.1@7.154,77.691 cw(c6.82,77.356) 7.293,77.356 cw(c7.766,77.356) C57.1@7.431,77.691
NetC58_1: C58.1 U9.8 | length 5.4
  Bottom Layer w0.508: U9.8@9.652,60.249 9.652,62.231 ; U9.8@9.652,60.944 cw(c11.783,60.944) C58.1@10.276,62.451 ; 9.652,62.17 cw(c10.557,62.17) C58.1@9.917,62.81 ; C58.1@9.96,62.539 9.652,62.231 ; C58.1@10.138,62.59 10.011,62.59 9.652,62.231
NetC59_1: C59.1 U8.6 | length 6.2
  Bottom Layer w0.508: C59.1@0.098,73.536 2.289,73.536 2.946,74.193 U8.6@2.946,75.59 ; C59.1@0.236,73.397 cw(c0.571,73.063) 0.571,73.536 cw(c0.571,74.009) C59.1@0.236,73.675 ; 2.554,73.801 ccw(c1.73,74.625) U8.6@2.896,74.625
NetC59_2: C59.2 R141.1 | length 2.9
  Bottom Layer w0.508: C59.2@-0.041,71.797 cw(c-0.376,71.463) 0.098,71.463 cw(c0.571,71.463) C59.2@0.236,71.797 ; R141.1@-0.037,70.624 ccw(c-0.361,70.948) 0.098,70.948 ; 0.098,70.969 ccw(c0.586,70.969) R141.1@0.241,70.624 ; C59.2@0.098,71.936 0.098,70.489 R141.1@0.102,70.485
NetC60_1: C60.1 U9.6 | length 5.3
  Bottom Layer w0.508: C60.1@4.365,58.194 6.759,58.194 7.112,58.547 U9.6@7.112,60.249 ; C60.1@4.503,58.056 cw(c4.838,57.721) 4.838,58.194 cw(c4.838,58.668) C60.1@4.503,58.333
NetC60_2: C60.2 R142.1 | length 3
  Bottom Layer w0.508: C60.2@4.226,56.456 cw(c3.892,56.121) 4.365,56.121 cw(c4.838,56.121) C60.2@4.503,56.456 ; R142.1@4.231,55.18 ccw(c3.907,55.504) 4.365,55.504 ; 4.365,55.526 ccw(c4.853,55.526) R142.1@4.508,55.18 ; C60.2@4.365,56.594 4.365,55.046 R142.1@4.369,55.042
NetC69_2: C69.2 D10.2 D11.2 J11.3 | length 42.7
  Top Layer w0.508: J11.3@1.515,60.258 cw(c0.648,59.391) 1.874,59.391 cw(c3.101,59.391) J11.3@2.234,60.258 ; 1.778,51.172 cw(c3.692,51.172) v3@2.339,52.525 ; J11.3@1.874,60.618 1.874,58.324 v2(2.794,57.404) ; v3(2.159,52.705) 1.778,52.324 1.778,48.514 0.508,47.244 0.508,45.847 1.524,44.831 v2(4.724,44.831) ; v2@2.413,57.404 ccw(c1.493,57.404) 2.144,58.054 ccw(c2.794,58.705) v2@2.794,57.785 ; v2@4.455,44.562 ccw(c3.805,43.911) 3.805,44.831 ccw(c3.805,45.751) v2@4.455,45.1
  Bottom Layer w0.508: 1.778,54.238 ccw(c3.692,54.238) v3@2.339,52.885 ; J11.3@1.874,60.618 1.915,60.658 C69.2@3.552,60.658 ; v3(2.159,52.705) 1.778,53.086 1.778,56.388 v2(2.794,57.404) ; J11.3@2.234,60.258 cw(c3.199,59.293) C69.2@3.199,60.658 ; J11.3@2.234,60.977 ccw(c3.002,61.746) 3.002,60.658 ; v2@2.413,57.404 cw(c1.493,57.404) 2.144,56.754 cw(c2.794,56.103) v2@2.794,57.023 ; C69.2@3.413,60.52 ccw(c3.079,60.185) 3.079,60.658 ccw(c3.079,61.132) C69.2@3.413,60.797 ; D10.2@4.455,43.957 ccw(c3.805,44.608) 4.724,44.608 ccw(c5.644,44.608) D10.2@4.994,43.957 ; v2@4.455,44.562 cw(c3.805,43.911) 4.724,43.911 cw(c5.644,43.911) v2@4.994,44.562 ; v2@4.455,45.1 ccw(c3.805,45.751) 4.724,45.751 ccw(c5.644,45.751) v2@4.994,45.1 ; D11.2@4.455,45.654 cw(c3.805,45.003) 4.724,45.003 cw(c5.644,45.003) D11.2@4.994,45.654 ; D10.2@4.724,43.688 v2(4.724,44.831) D11.2@4.724,45.923
NetC76_2: C76.2 R166.1 U14.18 Y2.2 | length 18.4
  Top Layer w0.254: v1@56.843,79.195 cw(c56.41,78.762) 57.023,78.762 cw(c57.636,78.762) v1@57.203,79.195 ; v1(57.023,79.375) 57.023,78.314 57.383,77.954 U14.18@57.383,76.693
  Bottom Layer w0.254: C76.2@55.47,79.854 C76.2@55.475,79.858 ; C76.2@55.699,79.625 cw(c56.261,79.063) 56.261,79.858 ; C76.2@55.699,80.082 ccw(c56.24,80.623) 56.24,79.858 ; Y2.2@55.833,78.908 ccw(c55.833,80.05) 56.64,79.243 ccw(c57.448,78.435) Y2.2@56.306,78.435 ; Y2.2@55.883,78.486 Y2.2@55.833,78.435 56.769,79.372 56.769,79.706 R166.1@56.921,79.858 C76.2@55.475,79.858 ; 56.008,79.858 cw(c56.008,78.551) v1(57.023,79.375) ccw(c57.023,78.77) 56.595,79.198 ; Y2.2@56.134,78.736 ccw(c55.012,79.858) R166.1@56.598,79.858 ; Y2.2@56.162,78.764 cw(c57.023,77.903) v1@57.023,79.121 ; R166.1@56.542,79.858 cw(c56.542,78.984) R166.1@57.22,79.535 ; 56.567,79.17 ccw(c55.879,79.858) R166.1@56.852,79.858 ; R166.1@56.693,79.63 ccw(c56.142,79.078) 56.142,79.858 ccw(c56.142,80.638) R166.1@56.693,80.086 ; v1@56.826,79.215 ccw(c55.475,78.118) C76.2@55.475,79.858
NetC77_2: C77.2 R166.2 U14.17 Y2.1 | length 18.7
  Top Layer w0.254: v1@57.605,78.433 cw(c56.936,77.764) 57.883,77.764 ; U14.17@57.883,76.693 57.883,78.457 v1@57.912,78.486 ; 57.883,78.236 cw(c58.162,78.236) v1@57.965,78.433
  Bottom Layer w0.254: v1@57.605,78.433 cw(c57.172,78) 57.785,78 cw(c58.398,78) v1@57.965,78.433 ; v1@57.785,78.867 ccw(c57.785,79.48) 58.219,79.047 ccw(c58.652,78.613) v1@58.039,78.613 ; v1@58.039,78.867 ccw(c57.465,79.442) R166.2@58.221,79.74 ; 58.313,79.141 ccw(c57.858,79.597) R166.2@58.457,79.833 ; R166.2@58.75,79.63 cw(c59.301,79.078) 59.301,79.858 cw(c59.301,80.638) R166.2@58.75,80.086 ; 59.159,79.858 ccw(c59.159,80.65) C77.2@59.719,80.09 ; 59.176,79.858 cw(c59.176,79.09) C77.2@59.719,79.633 ; Y2.1@59.94,75.496 ccw(c59.132,74.688) 59.132,75.83 ccw(c59.132,76.972) Y2.1@59.94,76.165 ; C77.2@59.947,79.862 59.944,79.858 R166.2@58.521,79.858 58.521,79.349 v1(57.785,78.613) 57.785,76.2 58.155,75.83 Y2.1@60.274,75.83
NetC81_2: C81.2 U14.44 | length 5.3
  Top Layer w0.254: C81.2@55.978,65.942 57.306,65.942 57.883,66.519 U14.44@57.883,68.493 ; C81.2@56.207,65.714 cw(c56.758,65.163) 56.758,65.942 cw(c56.758,66.722) C81.2@56.207,66.171
NetC82_1: C82.1 U15.3 | length 3.1
  Bottom Layer w0.254: C82.1@59.535,69.668 cw(c58.983,69.117) 59.763,69.117 cw(c60.543,69.117) C82.1@59.992,69.668 ; U15.3@59.618,68.774 ccw(c59.269,69.123) 59.763,69.123 ; U15.3@59.763,68.674 C82.1@59.763,69.897 ; 59.763,69.015 ccw(c60.104,69.015) U15.3@59.863,68.774
NetC82_2: C82.2 R168.2 | length 3.9
  Bottom Layer w0.254: C82.2@61.135,70.125 ccw(c60.576,70.684) 61.366,70.684 ; R168.2@61.138,71.095 cw(c60.586,70.544) 61.366,70.544 cw(c62.146,70.544) R168.2@61.595,71.095 ; C82.2@61.366,69.9 R168.2@61.366,71.324 ; 61.366,70.669 ccw(c62.136,70.669) C82.2@61.592,70.125
NetD1_2: D1.2 R25.1 R37.1 | length 14.7
  Top Layer w0.508: v3@3.81,11.811 5.251,13.252 v1(6.66,13.252) ; v3@4.191,11.557 cw(c5.724,11.557) 4.64,12.641
  Bottom Layer w0.508: D1.2@3.197,12.638 ccw(c1.275,14.56) R37.1@3.993,14.56 ; D1.2@3.556,12.279 ccw(c2.502,13.333) 3.993,13.333 ; D1.2@3.697,12.255 ccw(c4.076,12.037) v3@3.766,11.728 ; v3(3.937,11.557) 3.358,12.136 D1.2@3.358,12.413 3.993,13.048 3.993,14.878 R37.1@4.12,15.004 ; 3.993,14.225 cw(c4.898,14.225) R37.1@4.258,14.866 ; v1(6.66,13.252) R25.1@7.397,13.252 ; R25.1@7.258,13.114 ccw(c6.923,12.779) 6.923,13.252 ccw(c6.923,13.725) R25.1@7.258,13.391
NetD2_2: D2.2 R27.1 R38.1 | length 13.8
  Top Layer w0.508: v1(19.812,13.843) 20.066,13.589 v3@22.479,13.589 ; v1@19.902,13.933 ccw(c20.732,14.763) 20.732,13.589 ; 21.559,13.589 cw(c21.559,12.542) v3@22.299,13.282
  Bottom Layer w0.508: D2.2@19.041,12.671 ccw(c17.181,14.531) 19.812,14.531 ; D2.2@19.202,12.446 19.812,13.056 19.812,14.859 R38.1@20.015,15.062 ; D2.2@19.401,12.311 ccw(c18.407,13.304) 19.812,13.304 ; v1@19.812,14.099 cw(c20.978,14.099) R38.1@20.153,14.924 ; v3@22.479,13.589 22.86,13.208 R27.1@23.292,13.208 cw(c23.292,13.859) v3@22.707,13.573 ; v3@22.695,13.373 ccw(c22.938,13.616) R27.1@23.163,13.356
  other v3: 22.479,13.462
NetD3_2: D3.2 R29.1 R39.1 | length 20.4
  Top Layer w0.305: v1(36.957,13.589) 38.862,13.589 v1(39.37,13.081) ; v1@37.119,13.427 cw(c37.509,13.037) 37.509,13.589 cw(c37.509,14.141) v1@37.119,13.751 ; v1@39.141,13.081 ccw(c38.59,13.081) 38.98,13.471 ccw(c39.37,13.861) v1@39.37,13.31
  Bottom Layer w0.305: D3.2@36.17,12.446 36.17,12.802 v1(36.957,13.589) ; D3.2@36.345,12.47 cw(c37.118,12.633) 36.559,13.191 ; R39.1@36.365,19.424 cw(c35.857,18.916) 36.576,18.916 cw(c37.294,18.916) R39.1@36.786,19.424 ; R39.1@36.576,19.634 36.576,18.669 37.719,17.526 37.719,15.113 36.957,14.351 v1(36.957,13.589) ; D3.2@36.643,12.533 cw(c37.775,12.771) v1(36.957,13.589) ; v1@36.728,13.589 cw(c36.177,13.589) 36.567,13.199 cw(c36.957,12.809) v1@36.957,13.36 ; v1@36.795,13.751 ccw(c36.405,14.141) 36.957,14.141 ccw(c37.509,14.141) v1@37.119,13.751 ; v1(39.37,13.081) 39.37,12.573 ; R29.1@40.157,12.192 39.751,12.192 39.37,12.573 ; 39.37,12.573 cw(c39.82,12.573) 39.522,12.91 ccw(c39.82,12.573) 39.37,12.573 ; 39.37,12.573 ccw(c38.92,12.573) 39.218,12.91 cw(c38.92,12.573) 39.37,12.573
NetD4_2: D4.2 R31.1 R40.1 | length 21.4
  Top Layer w0.254: v1@50.673,13.462 v1(53.086,13.462) ; v1@50.853,13.769 ccw(c51.593,14.509) 51.593,13.462 ; v1@52.906,13.282 ccw(c52.473,12.849) 52.473,13.462 ccw(c52.473,14.075) v1@52.906,13.642
  Bottom Layer w0.254: R40.1@48.438,19.609 cw(c47.886,19.058) 48.666,19.058 cw(c49.446,19.058) R40.1@48.894,19.609 ; R40.1@48.666,19.837 48.666,18.898 50.038,17.526 50.038,14.859 50.673,14.224 v1(50.673,13.589) v1@50.673,13.462 ; D4.2@49.784,12.446 49.784,12.573 v1@50.673,13.462 ; D4.2@49.848,12.89 ccw(c49.848,13.504) 50.281,13.07 ; D4.2@50.038,12.456 cw(c50.831,12.497) 50.269,13.058 ; D4.2@50.15,12.939 ccw(c49.499,13.589) v1@50.419,13.589 ; D4.2@50.291,12.469 cw(c51.598,12.537) v1@50.673,13.462 ; 50.456,13.245 cw(c50.673,13.028) v1@50.673,13.335 ; v1@50.493,13.769 ccw(c50.06,14.202) 50.673,14.202 ccw(c51.286,14.202) v1@50.853,13.769 ; v1@53.266,13.282 cw(c53.699,12.849) 53.699,13.462 cw(c53.699,14.075) v1@53.266,13.642 ; 53.478,13.462 cw(c53.478,12.986) R31.1@53.912,13.18 ; R31.1@53.68,13.077 ccw(c53.086,12.811) v1(53.086,13.462) 53.721,13.462 R31.1@53.975,13.208
NetD7_2: D7.2 E3.1 R133.1 U8.2 | length 25.1
  Top Layer w0.508: D7.2@4.818,68.614 cw(c5.473,67.959) 5.473,68.885 ; D7.2@4.955,69.307 ccw(c5.588,69.571) 5.588,68.885 ; D7.2@4.958,68.885 ccw(c4.958,70.219) E3.1@6.277,70.023 ; v3@5.281,71.956 cw(c4.848,71.523) 5.461,71.523 cw(c6.074,71.523) v3@5.641,71.956 ; 5.315,71.393 cw(c4.186,70.264) E3.1@5.772,70.078 ; v3@5.461,72.39 5.461,71.247 6.706,70.002 5.588,68.885 ; 5.547,68.885 ccw(c5.547,70.131) E3.1@6.78,69.948 ; 5.734,69.031 ccw(c5.324,69.441) E3.1@5.839,69.706 ; E3.1@5.775,70.097 cw(c4.369,70.306) 4.369,68.885 5.588,68.885 ; E3.1@5.809,69.106 cw(c6.414,68.502) E3.1@6.414,69.356 ; E3.1@5.809,70.899 ccw(c6.414,71.503) E3.1@6.414,70.648
  Bottom Layer w0.508: U8.2@4.216,70.002 4.216,71.653 4.521,71.958 ; v3@5.268,72.301 cw(c4.521,72.943) 4.521,71.958 ; v3@5.461,72.39 v3@5.461,71.958 ; v3@5.641,72.316 ccw(c6.503,73.178) 6.503,71.958 ; R133.1@6.973,71.82 ccw(c6.638,71.485) 6.638,71.958 ccw(c6.638,72.431) R133.1@6.973,72.097 ; R133.1@7.112,71.958 v3@5.461,71.958 ; 4.521,71.958 v3@5.461,71.958
  other v3: 5.461,72.136
NetD8_2: D8.2 E4.1 R134.1 U9.2 | length 28.4
  Top Layer w0.762: D8.2@0.102,56.49 1.016,56.49 1.372,56.134 ; D8.2@0.717,56.628 ccw(c1.372,56.814) 1.372,56.134 ; D8.2@0.719,56.622 ccw(c1.422,56.812) 1.422,56.083 ; 2.314,56.134 cw(c2.314,58.575) 0.588,56.849 ccw(c2.436,58.697) 2.436,56.083 ; E4.1@3.353,54.356 3.353,56.083 ; 3.353,56.134 4.445,56.134 ; E4.1@3.921,54.725 cw(c5.26,56.083) 3.353,56.083 ; v2(8.382,56.134) 4.445,56.134 ; 1.372,56.134 1.422,56.083 ; 1.372,56.134 4.445,56.134 ; 1.422,56.083 3.353,56.083
  Bottom Layer w0.508: v2@8.113,55.865 cw(c7.462,55.214) 8.382,55.214 cw(c9.302,55.214) v2@8.651,55.865 ; U9.2@8.382,54.661 v2(8.382,56.134) 8.865,56.617 R134.1@11.277,56.617 ; U9.2@8.433,55.626 cw(c9.782,55.626) v2@8.828,56.58 ; R134.1@11.139,56.478 ccw(c10.804,56.143) 10.804,56.617 ccw(c10.804,57.09) R134.1@11.139,56.755
NetD10_1: D10.1 Q12.3 R153.1 R154.1 | length 14.8
  Bottom Layer w0.508: R153.1@0.889,40.132 R154.1@0.889,41.656 ; 0.889,40.692 cw(c2.056,40.692) 1.231,41.517 cw(c1.565,41.182) 1.565,41.656 cw(c1.565,42.129) R154.1@1.231,41.794 ; 0.889,41.095 ccw(c2.056,41.095) R153.1@1.231,40.27 ; R154.1@1.505,41.656 cw(c1.505,40.76) Q12.3@2.384,40.93 ; Q12.3@1.885,40.834 ccw(c0.889,40.641) R154.1@0.889,41.656 ; Q12.3@2.036,41.119 ccw(c1.494,41.661) 2.261,41.661 ccw(c3.027,41.661) Q12.3@2.485,41.119 ; D10.1@2.042,43.419 cw(c1.514,42.891) 2.261,42.891 ; 2.121,41.656 cw(c2.121,40.879) Q12.3@2.883,41.027 ; Q12.3@2.261,40.894 2.261,41.91 ; 2.261,42.646 cw(c3.354,42.646) D10.1@2.581,43.419 ; D10.1@2.438,43.688 2.261,43.51 2.261,41.91 ; R154.1@0.889,41.656 2.006,41.656 2.261,41.91
NetD12_1: D12.1 R170.1 | length 7.2
  Top Layer w0.254: R170.1@29.464,72.923 30.251,72.923 31.068,73.74 ; R170.1@29.692,72.695 cw(c30.243,72.144) 30.243,72.923 cw(c30.243,73.703) R170.1@29.692,73.152 ; 30.308,72.98 cw(c31.498,71.789) D12.1@31.498,73.473 ; 30.741,73.413 cw(c31.498,72.656) D12.1@31.498,73.727 ; 30.852,73.524 cw(c31.095,73.281) D12.1@31.322,73.539 ; 31.044,73.716 cw(c31.275,73.485) D12.1@31.49,73.73 ; D12.1@31.26,73.621 ccw(c31.068,73.525) 31.068,73.74 ; D12.1@31.26,73.859 cw(c31.068,73.954) 31.068,73.74 ; D12.1@31.498,73.74 31.068,73.74
NetD13_1: D13.1 R169.1 | length 3.9
  Top Layer w0.254: R169.1@46.378,66.394 47.038,67.054 D13.1@47.73,67.054 ; R169.1@46.378,66.717 ccw(c46.378,67.497) 46.929,66.945 ccw(c47.481,66.394) R169.1@46.701,66.394 ; D13.1@47.541,66.865 ccw(c47.086,66.41) 47.086,67.054 ccw(c47.086,67.697) D13.1@47.541,67.242
NetF4_1: F4.1 Q11.1 R153.2 | length 10.3
  Bottom Layer w0.762: -1.651,42.327 cw(c-0.671,42.327) Q11.1@-1.364,43.02 ; Q11.1@-1.499,43.155 -1.651,43.002 -1.651,40.64 -1.143,40.132 -0.711,40.132 -0.711,38.811 ; -1.333,40.322 ccw(c-0.847,40.809) R153.2@-0.539,40.193 ; -0.711,39.031 ccw(c0.512,39.031) F4.1@-0.353,38.166 ; -0.711,39.474 cw(c0.149,39.474) R153.2@-0.459,40.083 ; F4.1@-0.4,38.207 cw(c0.032,38.811) -0.711,38.811 ; F4.1@0.203,37.897 -0.711,38.811
NetJ3_2: J3.2 R145.2 | length 7
  Top Layer w0.508: J3.2@61.671,41.453 J3.2@61.874,41.453 ; J3.2@61.925,41.453 J3.2@61.976,41.453
  Bottom Layer w0.508: R145.2@61.617,38.942 ccw(c60.75,39.809) 61.976,39.809 ccw(c63.202,39.809) R145.2@62.335,38.942 ; J3.2@61.617,40.967 cw(c60.75,40.099) 61.976,40.099 cw(c63.202,40.099) J3.2@62.335,40.967 ; R145.2@61.976,38.583 J3.2@61.976,41.453
NetJ12_1: J12.1 R161.2 | length 6
  Bottom Layer w0.762: J12.1@7.93,45.835 9.004,45.835 R161.2@9.83,45.008 ; J12.1@8.069,46.228 cw(c8.069,44.919) 8.994,45.845 ; J12.1@8.258,45.518 cw(c8.768,44.664) R161.2@9.471,45.367 ; J12.1@8.33,45.574 cw(c8.96,44.944) 8.96,45.835 cw(c8.96,46.726) J12.1@8.33,46.096
NetJ13_1: J13.1 U15.6 | length 4.5
  Bottom Layer w0.508: J13.1@61.832,65.067 ccw(c60.603,66.295) 62.341,66.295 ; J13.1@62.341,64.678 U15.6@62.341,66.751 ; 62.341,66.006 ccw(c63.669,66.006) J13.1@62.73,65.067
NetJ13_2: J13.2 U15.1 | length 4.5
  Bottom Layer w0.508: J13.2@59.292,65.067 ccw(c58.208,66.151) 59.741,66.151 ccw(c61.274,66.151) J13.2@60.19,65.067 ; J13.2@59.741,64.618 U15.1@59.741,66.751
NetLCD1_7: LCD1.7 R2.2 | length 7.7
  Top Layer w0.229: LCD1.7@54.458,38.862 54.458,39.599 55.778,40.919 R2.2@55.778,43.789 R2.2@55.928,43.639 ; LCD1.7@54.593,39.362 cw(c55.492,39.362) 54.857,39.998 ; R2.2@55.541,43.552 cw(c54.968,42.979) 55.778,42.979 cw(c56.589,42.979) R2.2@56.016,43.552
NetQ2_2: Q2.2 R3.1 | length 15
  Top Layer w0.229: R3.1@55.672,45.405 cw(c55.933,45.112) 56.211,45.389 ; R3.1@55.723,45.432 cw(c55.881,44.805) 56.338,45.262 ; R3.1@55.753,45.314 56.286,45.314 ; R3.1@55.779,45.21 cw(c55.995,44.349) 56.623,44.977 ; R3.1@55.824,45.234 cw(c56.095,44.932) 56.381,45.219 ; R3.1@55.977,45.064 cw(c56.256,44.751) 56.552,45.048 ; R3.1@56.056,45.169 cw(c56.286,45.059) 56.286,45.314 ; R3.1@56.056,45.459 ccw(c56.286,45.569) 56.286,45.314 ; 56.642,42.834 ccw(c57.998,42.834) Q2.2@57.039,41.875 ; 56.642,43.386 ccw(c58.55,43.386) Q2.2@57.201,42.037 56.642,42.596 56.642,44.958 56.286,45.314 ; 56.642,43.938 ccw(c59.102,43.938) Q2.2@57.362,42.199 ; 56.642,44.49 ccw(c59.654,44.49) Q2.2@57.524,42.36
NetQ2_3: Q2.3 R145.1 | length 20.5
  Top Layer w0.508: Q2.3@58.391,43.844 cw(c58.933,43.302) 58.933,44.069 cw(c58.933,44.836) Q2.3@58.391,44.294 ; Q2.3@58.471,44.069 59.817,44.069 60.452,43.434 60.452,40.259 61.976,38.735 v3(61.976,33.02) ; v3@61.796,33.2 ccw(c61.363,33.633) 61.976,33.633 ccw(c62.589,33.633) v3@62.156,33.2
  Bottom Layer w0.508: R145.1@61.617,34.794 cw(c60.75,33.927) 61.976,33.927 cw(c63.202,33.927) R145.1@62.335,34.794 ; v3@61.796,33.2 ccw(c61.363,33.633) 61.976,33.633 ccw(c62.589,33.633) v3@62.156,33.2 ; v3(61.976,33.02) R145.1@61.976,35.154